# Altium PCB Switch_board_left_PCB.PcbDoc
Units mil, origin at the board's own origin, x right, y up, seen from the top; angles counter-clockwise.
Board outline 2086.61 x 4330.71 mil, 2 copper layers (Top Layer, Bottom Layer); 33 components, 18 nets, 90 pads, 28 vias.
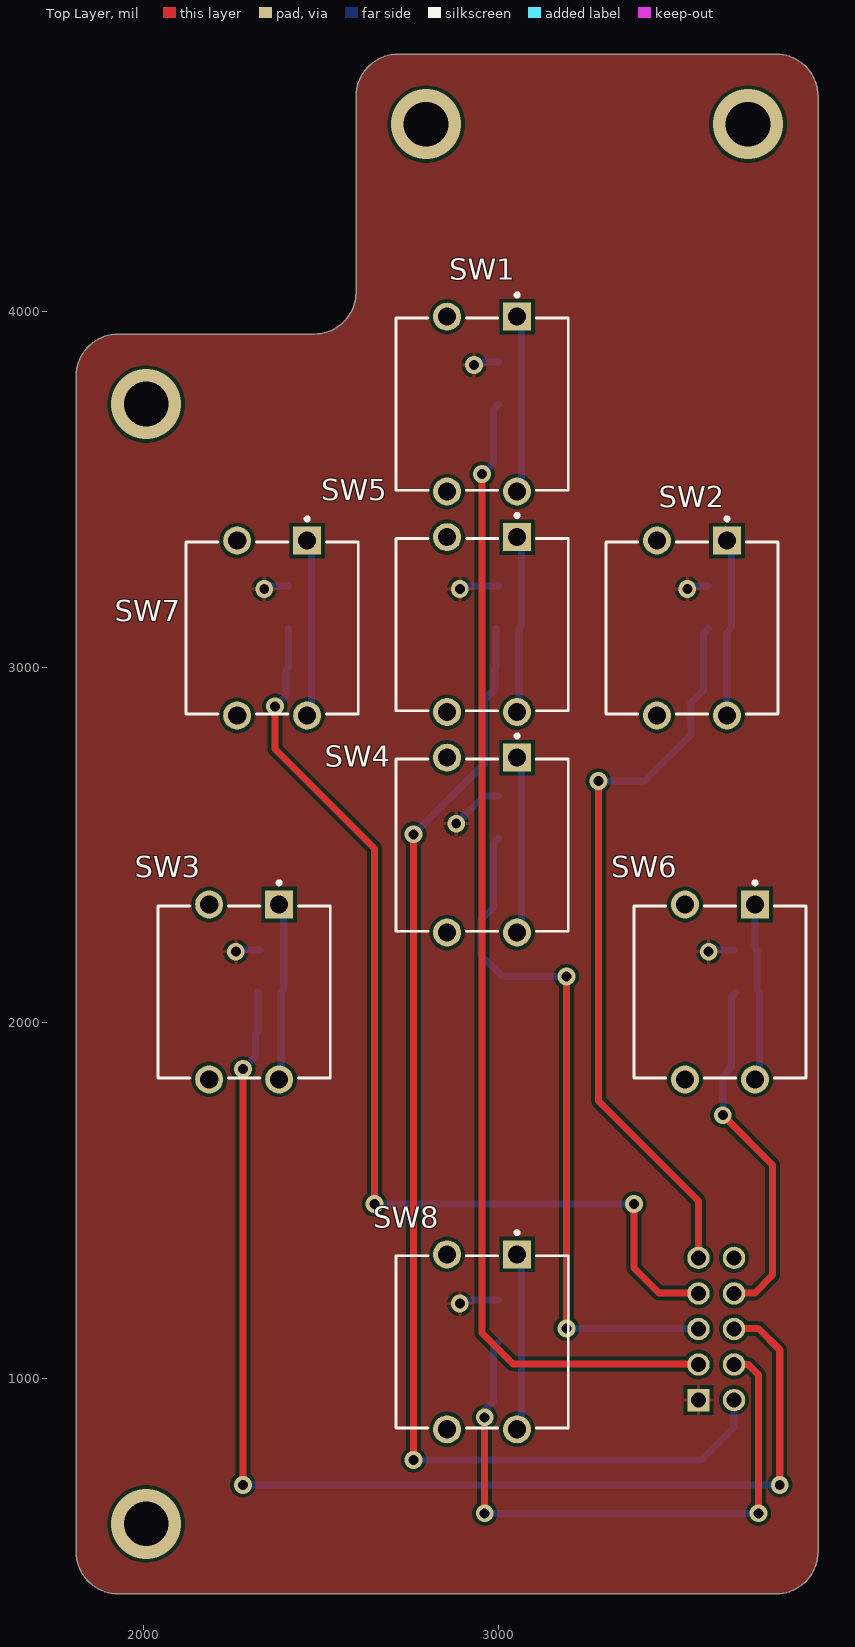
[diagram p0: Top Layer view]
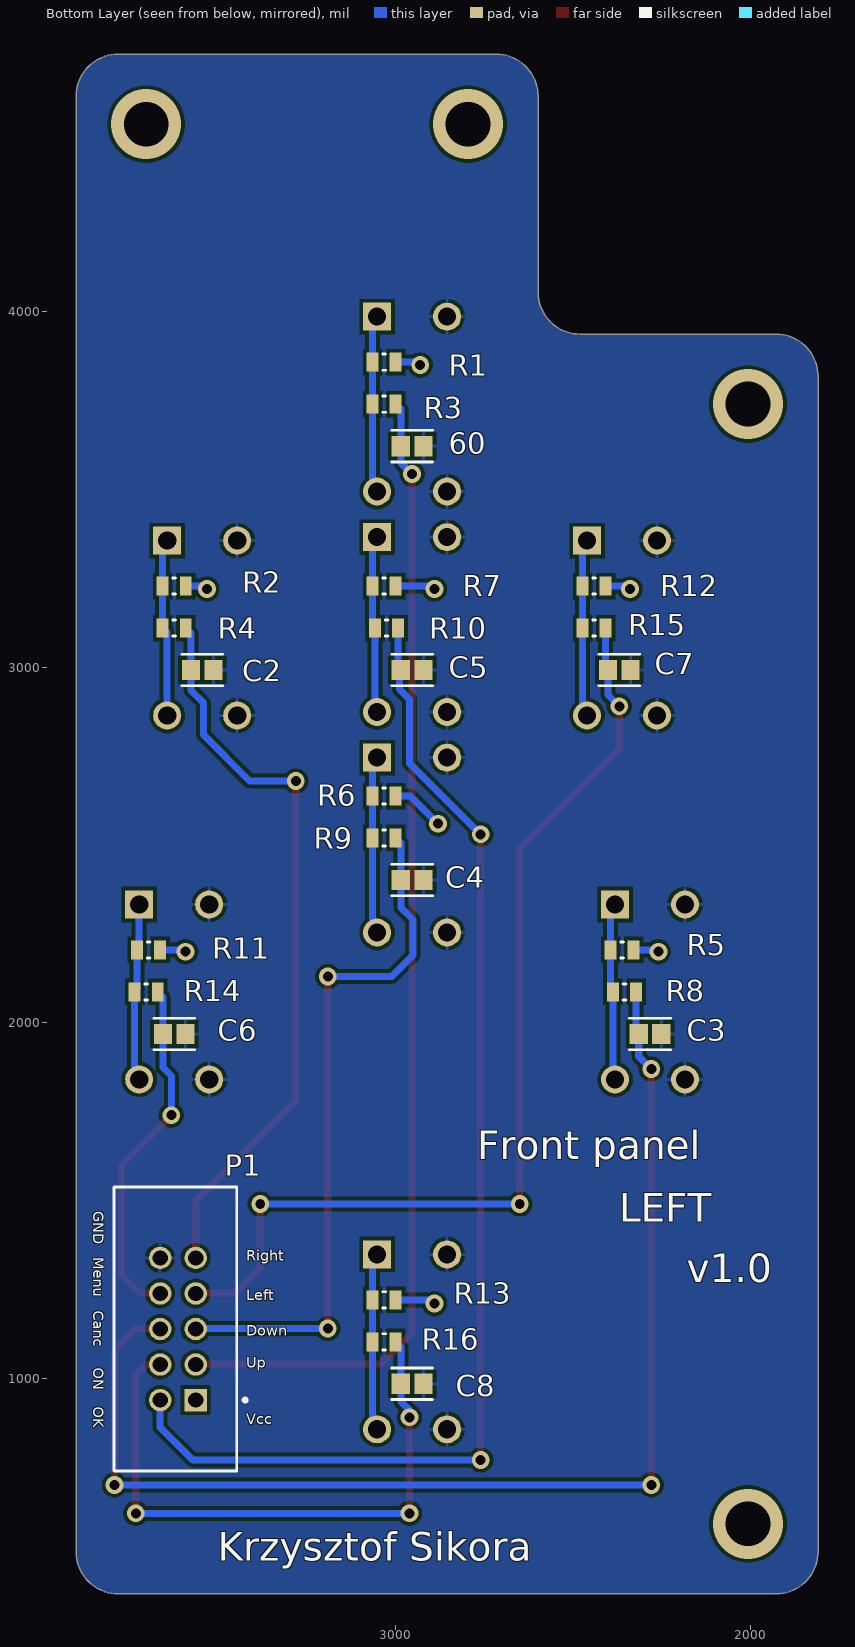
[diagram p1: Bottom Layer view, seen from below]
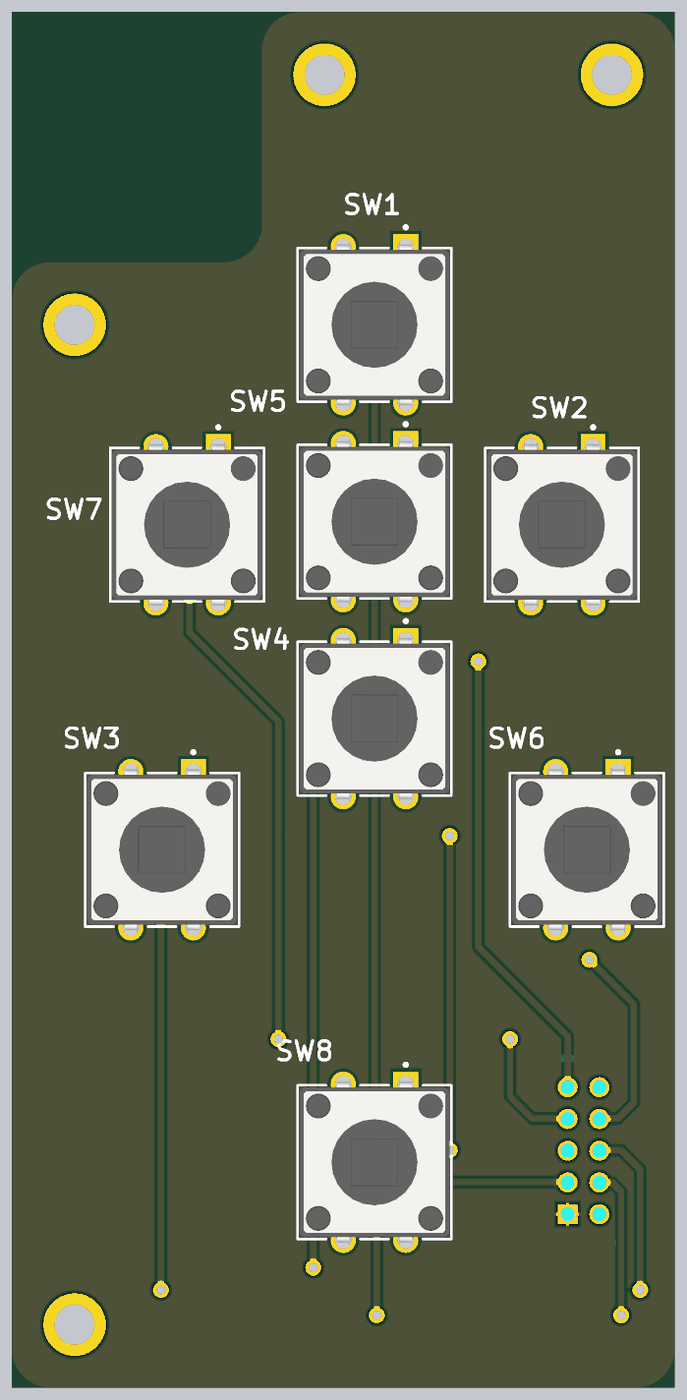
[diagram p2: 3D render of the assembled board from above, using the file's embedded part models]

## Layer stack, top to bottom
Top Solder: solder mask 0.4, Solder Resist, Dk 3.5
Top Layer: signal copper 1.4
Dielectric 1: dielectric 12.6, FR-4, Dk 4.8
Bottom Layer: signal copper 1.4
Bottom Solder: solder mask 0.4, Solder Resist, Dk 3.5

## Board outline
1811.02,511.81 1811.02,3818.9 cw(c1929.13,3818.9) 1929.13,3937.01 2480.32,3937.01 ccw(c2480.32,4055.12) 2598.43,4055.12 2598.43,4606.3 cw(c2716.54,4606.3) 2716.54,4724.41 3779.53,4724.41 cw(c3779.53,4606.3) 3897.64,4606.3 3897.64,511.81 cw(c3779.53,511.81) 3779.53,393.7 1929.13,393.7 cw(c1929.13,511.81)

## Design rules (kind name [scope] priority, off if disabled: settings)
Clearance Clearance_1 [OnMid vs OnMid] p1: gap=10 ignorepadtopadclearanceinfootprint=FALSE sourcerule=36 cellrowname=All cellrowtype=0 cellcolname=All cellcoltype=0 innerlayers=TRUE
Clearance Clearance_2 [(ExistsOnLayer('Top Layer') Or ExistsOnLayer('Bottom Layer')) vs (ExistsOnLayer('Top Layer') Or ExistsOnLayer('Bottom Layer'))] p2: gap=10 ignorepadtopadclearanceinfootprint=FALSE sourcerule=36 cellrowname=All cellrowtype=0 cellcolname=All cellcoltype=0 outerlayers=TRUE
Clearance [All] p3: gap=10 ignorepadtopadclearanceinfootprint=FALSE ismatrix=TRUE
PolygonConnect [All] p1: connectstyle=Relief reliefconductorwidth=10 reliefentries=4 polygonreliefangle="90 Angle" airgapwidth=10
RoutingVias [All] p1: holewidth=28 width=50 viastyle="Through Hole" minholewidth=28 minwidth=50 maxholewidth=28 maxwidth=50
SolderMaskExpansion [All] p1: expansion=4 istentingtop=FALSE
Width [All] p1: maxlimit=40 minlimit=10 preferedwidth=20 minimp=50.000000 maximp=50.000000 favimp=50.000000
30 further rules are at their usual default settings.

## Components (designator, comment, footprint, x,y, rotation, side; value= is the part's Value field where it differs from the comment)
60 "100nF" FP-0805-L_2_01_0_2-W_1_25-IPC_B 2952.76,3622.05 r180 bottom (schematic designator C1)
C2 "100nF" FP-0805-L_2_01_0_2-W_1_25-IPC_B 3543.31,2992.13 r180 bottom
C3 "100nF" FP-0805-L_2_01_0_2-W_1_25-IPC_B 2283.46,1968.5 r180 bottom
C4 "100nF" FP-0805-L_2_01_0_2-W_1_25-IPC_B 2952.76,2401.57 r180 bottom
C5 "100nF" FP-0805-L_2_01_0_2-W_1_25-IPC_B 2952.76,2992.13 r180 bottom
C6 "100nF" FP-0805-L_2_01_0_2-W_1_25-IPC_B 3622.05,1968.5 r180 bottom
C7 "100nF" FP-0805-L_2_01_0_2-W_1_25-IPC_B 2369.85,2992.13 r180 bottom
C8 "100nF" FP-0805-L_2_01_0_2-W_1_25-IPC_B 2952.76,984.25 r180 bottom
P1 "30310-6002HB" 3M-30310-6002HB-10_V 3611.42,1138.58 r90 bottom
R1 "1k" RESC2013X50X30LL20T20 3031.5,3858.27 r180 bottom
R2 "1k" RESC2013X50X30LL20T20 3622.05,3228.35 r180 bottom
R3 "1k" RESC2013X50X30LL20T20 3031.5,3740.16 r0 bottom
R4 "1k" RESC2013X50X30LL20T20 3622.05,3110.24 r0 bottom
R5 "1k" RESC2013X50X30LL20T20 2362.2,2204.72 r180 bottom
R6 "1k" RESC2013X50X30LL20T20 3031.5,2637.8 r180 bottom
R7 "1k" RESC2013X50X30LL20T20 3031.5,3228.35 r180 bottom
R8 "1k" RESC2013X50X30LL20T20 2355.31,2086.61 r0 bottom
R9 "1k" RESC2013X50X30LL20T20 3031.5,2519.68 r0 bottom
R10 "1k" RESC2013X50X30LL20T20 3024.61,3110.24 r0 bottom
R11 "1k" RESC2013X50X30LL20T20 3693.9,2204.72 r180 bottom
R12 "1k" RESC2013X50X30LL20T20 2440.94,3228.35 r180 bottom
R13 "1k" RESC2013X50X30LL20T20 3031.5,1220.47 r180 bottom
R14 "1k" RESC2013X50X30LL20T20 3700.79,2086.61 r0 bottom
R15 "1k" RESC2013X50X30LL20T20 2440.94,3110.24 r0 bottom
R16 "1k" RESC2013X50X30LL20T20 3031.5,1102.36 r0 bottom
SW1 "FSM103" FP-FSM103-MFG 2952.76,3740.16 r90 top
SW2 "FSM103" FP-FSM103-MFG 3543.31,3110.24 r90 top
SW3 "FSM103" FP-FSM103-MFG 2283.46,2086.61 r90 top
SW4 "FSM103" FP-FSM103-MFG 2952.76,2499.66 r90 top
SW5 "FSM103" FP-FSM103-MFG 2952.76,3119.91 r90 top
SW6 "FSM103" FP-FSM103-MFG 3622.05,2086.61 r90 top
SW7 "FSM103" FP-FSM103-MFG 2362.2,3110.24 r90 top
SW8 "FSM103" FP-FSM103-MFG 2952.76,1102.36 r90 top

## Footprints (in the part's own frame and the unit in brackets; to place one, negate y for a bottom-side part, rotate by r counter-clockwise, add the part's x,y. Pads: shape width x height; smd on the part's side, far side on the other; paste and mask are expansions set on the pad)
3M-30310-6002HB-10_V [mm] "CONN, 10-Leads, Body 20.3x8.4mm, Pitch 2.54mm"
  rect 1.6x1.6 hole 1.09: 1(-5.08,-1.27)
  round 1.6 hole 1.09: 2(-5.08,1.27) 3(-2.54,-1.27) 4(-2.54,1.27) 5(0,-1.27) 6(0,1.27) 7(2.54,-1.27) 8(2.54,1.27) 9(5.08,-1.27) 10(5.08,1.27)
  silkscreen extent -10.15,-4.92 10.15,4.58, body extent -10.15,-4.2 10.15,4.61, height 8.89
FP-0805-L_2_01_0_2-W_1_25-IPC_B [mil]
  rect 51.36x57.33 smd paste+0 mask+0: 1(-31.72,0) 2(31.72,0)
  silkscreen extent -57,-44 57,44, body extent -40,-25 40,25, height 55
FP-FSM103-MFG [mm]
  rect 2x2 hole 1.3 paste-2539.97 mask+0: 1(6.25,-2.5)
  round 2 hole 1.3 paste-2539.97 mask+0: 2(-6.25,-2.5) 3(6.25,2.5) 4(-6.25,2.5)
  silkscreen extent -6.15,-6.15 7.92,6.15, body extent -7.35,-6.25 7.35,6.25, height 0.25
RESC2013X50X30LL20T20 [mm] "Chip Resistor, 2-Leads, Body 2.00x1.25mm, IPC High Density"
  rect 0.85x1.35 smd: 1(-0.825,0) 2(0.825,0)
  silkscreen extent -0.1,-0.58 0.1,0.58, body extent -1.1,-0.72 1.1,0.72, height 0.5

## Part data
60 C2 C3 C4 C5 C6 C7 C8: library part CMP-2007-04174-2, "General Purpose Ceramic Capacitor, 0805, 100nF, 10%, X7R, 15%, 100V", Case Code (Imperial)=0805, Case Code (Metric)=2012, Dielectric=X7R, Dielectric Material=Ceramic, Max Operating Temperature=125°C, Min Operating Temperature=-55°C, Package Quantity=2000, Tolerance=10%, Voltage=100V, Capacitance=100nF, Case/Package=0805, Construction=Flat, Contact Plating=Tin, Depth=1.25mm, Height=1.4mm, Lead Free="Lead Free", Length=2.01mm, Mount="Surface Mount", Number of Pins=2, Packaging="Tape and Reel", Radiation Hardening=No, REACH SVHC="No SVHC", RoHS Compliant=Yes, Series=-, Termination=SMD/SMT, Thickness=0.055inch, Voltage Rating=100V, Voltage Rating (DC)=100V, Width=0.049inch
P1: library part CMP-2000-05031-1, "Male Header, Pitch 2.54 mm, 2 x 5 Position, Height 9.3 mm, Tail Length 2.79 mm, -55 to 105 degC, RoHS, Bulk", Current Rating=1A, Manufacturer=3M, Brand=3MElectronicSolutionsDivision, Contact Gender=Pin(Male), Contact Material=Brass, Contact Plating=Gold, Datasheet URL=http://datasheet.octopart.com/30310-6002HB-3M-datasheet-11537585.pdf, Datasheet Version=Apr-12, Factory Pack Quantity=1000, Housing Material=Polyester, Manufacturer URL=http://www.3m.com/, Mating Post Length=5.99mm, Mounting Angle=Straight, Mounting Style=StraightPin, Number of Positions=10Position, Number of Rows=2Row, Packaging=Tray, Pitch=2.54mm, Product=Headers, Product Category=Headers&WireHousings, RoHS=Details, Row Spacing=2.54mm, Series=303, Termination Post Length=2.79mm, Termination Style=ThroughHole, Type=Shrouded
R1 R2 R3 R4 R5 R6 R7 R8 R9 R10 R11 R12 R13 R14 R15 R16: library part CMP-2001-04896-1, Manufacturer="Vishay Dale", Part Number=CRCW08050000Z0EA
SW1 SW2 SW3 SW4 SW5 SW6 SW7 SW8: library part CMP-03407-000037-1, "SWITCH TACTILE SPST-NO 0.05A 24V", Actuator Color=Black, Contact Current Rating=50mA, Contact Resistance=100mR, Max Operating Temperature=85°C, Max Voltage Rating (DC)=12V, Min Operating Temperature=-35°C, Operating Force=1.57N, Package Quantity=400, Voltage Rating=24V, Actuator Length=3.4mm, Actuator Material=Polyester, Contact Material=Brass, Contact Plating=Silver, Current Rating=50mA, Depth=14.1mm, Electrical Life=100000Cycles, Illumination Type=Non-Illuminated, Length=12mm, Max Current Rating=50mA, Mechanical Life=100000Cycles, Mount="Through Hole", Orientation=Straight, Packaging="Loose Piece", Radiation Hardening=No, RoHS Compliant=Yes, Series="FSM100 ~ 104", Switch Function=Off-Mom, Switch Travel=0.3mm, Termination="PC Pins", Throw Configuration=SPST, Type=Switch, Voltage Rating (DC)=12V, Width=12mm

## Via types
v1: diameter 50, hole 28, Top Layer to Bottom Layer, 24 vias
v2: diameter 196.85, hole 125.98, Top Layer to Bottom Layer, 4 vias

## Nets (pads, with @x,y where several pads share a name; then routed paths per layer and width w, separated by ;. In a path a pad name is that pad's centre, name@x,y a point inside that pad or via, vN(x,y) a via of type N, cw(c..) or ccw(c..) an arc to the next point about the centre after c; other vN are vias at no path point)
BtnCancel: C3.1 P1.6 R8.1 | length 3448.4
  Top Layer w20: v1(2280,700) v1(2280,1870) ; P1.6 3662.83,1140 3730,1140 3790,1080 v1(3790,700)
  Bottom Layer w20: v1(2280,700) v1(3790,700) ; v1(2280,1870) 2315.19,1905.19 C3.1 2322.83,1976.15 R8.1
BtnDC_ON: C8.1 P1.4 R16.1 | length 1738.9
  Top Layer w20: v1(2960,620) v1(2960,890) ; P1.4 3701.42,1038.58 3730,1010 3730,627.78 v1(3730,620)
  Bottom Layer w20: v1(2960,620) v1(3730,620) ; v1(2960,890) 2960,910 2984.48,934.48 C8.1 2984.48,1087.83 R16.1
BtnDOWN: C4.1 P1.5 R9.1 | length 1976.8
  Top Layer w20: v1(3190,1140) v1(3190,2130)
  Bottom Layer w20: R9.1 2984.48,2505.15 C4.1 2984.48,2324.48 2950,2290 2950,2190 3010,2130 v1(3190,2130) ; v1(3190,1140) 3560,1140 P1.5
BtnLEFT: C7.1 P1.7 R15.1 | length 2873.1
  Top Layer w20: v1(2370,2890) 2370,2770 2650,2490 v1(2650,1490) ; v1(3380,1490) 3380,1310 3450,1240 3560,1240 P1.7
  Bottom Layer w20: v1(2370,2890) 2401.57,2921.57 C7.1 2408.46,2999.02 R15.1 ; v1(2650,1490) v1(3380,1490)
BtnMenu: C6.1 P1.8 R14.1 | length 1000.4
  Top Layer w20: v1(3630,1740) 3770,1600 3770,1290 3720,1240 3662.83,1240 P1.8
  Bottom Layer w20: v1(3630,1740) 3630,1850 3653.77,1873.77 C6.1 3653.77,2072.08 R14.1
BtnOK: C5.1 P1.2 R10.1 | length 3458.2
  Top Layer w20: v1(2760,770) v1(2760,2530)
  Bottom Layer w10: C5.1 C5.1@2988.3,2995.95
  Bottom Layer w20: v1(2760,770) 3570,770 3661.42,861.42 P1.2 ; v1(2760,2530) 2960,2730 2960,2910 2988.3,2938.3 2988.3,2995.95 2992.13,2999.77 R10.1
BtnRIGHT: C2.1 P1.9 R4.1 | length 2092.6
  Top Layer w20: v1(3280,2680) 3280,1780 3561.42,1498.58 P1.9
  Bottom Layer w20: v1(3280,2680) 3410,2680 3540,2810 3540,2900 3575.03,2935.03 C2.1 3575.03,3095.7 R4.1
BtnUP: 60.1 P1.3 R3.1 | length 3277.5
  Top Layer w20: v1(2952.76,3543.31) 2952.76,1127.24 3040,1040 3560,1040 P1.3
  Bottom Layer w20: v1(2952.76,3543.31) 2984.48,3575.03 60.1 2984.48,3725.62 R3.1
GND: 60.2 C2.2 C3.2 C4.2 C5.2 C6.2 C7.2 C8.2 P1.10 SW1.3 SW1.4 SW2.3 SW2.4 SW3.3 SW3.4 SW4.3 SW4.4 SW5.3 SW5.4 SW6.3 SW6.4 SW7.3 SW7.4 SW8.3 SW8.4
NetR1_1: R1.1 R3.2 SW1.1 SW1.2 | length 502.7
  Bottom Layer w20: SW1.2 3063.98,3506.89 R3.2 R1.1 3063.98,3973.43 SW1.1
NetR2_1: R2.1 R4.2 SW2.1 SW2.2 | length 502.7
  Bottom Layer w20: SW2.2 3641.73,3097.44 R4.2 R2.1 3654.53,3343.5 SW2.1
NetR5_1: R5.1 R8.2 SW3.1 SW3.2 | length 502.7
  Bottom Layer w20: SW3.2 2387.8,1846.46 R8.2 2394.68,2093.5 R5.1 2394.68,2319.88 SW3.1
NetR6_1: R6.1 R9.2 SW4.1 SW4.2 | length 502.7
  Bottom Layer w20: SW4.2 3063.98,2266.4 R9.2 R6.1 3063.98,2732.93 SW4.1
NetR7_1: R7.1 R10.2 SW5.1 SW5.2 | length 502.7
  Bottom Layer w20: SW5.2 3057.09,2879.75 R10.2 3063.98,3117.13 R7.1 3063.98,3353.18 SW5.1
NetR11_1: R11.1 R14.2 SW6.1 SW6.2 | length 502.7
  Bottom Layer w20: SW6.2 3733.27,1853.35 R14.2 3726.38,2093.5 R11.1 3720.47,2210.63 SW6.1
NetR12_1: R12.1 R15.2 SW7.1 SW7.2 | length 502.7
  Bottom Layer w20: SW7.2 2473.43,2876.97 R15.2 R12.1 2473.43,3343.5 SW7.1
NetR13_1: R13.1 R16.2 SW8.1 SW8.2 | length 502.7
  Bottom Layer w20: SW8.2 3063.98,869.09 R16.2 R13.1 3063.98,1335.63 SW8.1
Vcc3_3: P1.1 R1.2 R2.2 R5.2 R6.2 R7.2 R11.2 R12.2 R13.2 | length 729.5
  Bottom Layer w20: v1(2260,2200) 2264.72,2204.72 R5.2 ; v1(2340,3220) 2348.35,3228.35 R12.2 ; v1(2880,2560) 2957.8,2637.8 R6.2 ; v1(2890,1210) 2900.47,1220.47 R13.2 ; v1(2890,3220) 2898.35,3228.35 R7.2 ; v1(2930,3850) 2938.27,3858.27 R1.2 ; v1(3530,3220) 3538.35,3228.35 R2.2 ; v1(3590,2200) 3594.72,2204.72 R11.2
copper on no net:
  other v2: 2007.87,590.55 2007.87,3740.16 2795.28,4527.56 3700.79,4527.56

## Polygon pours and split planes (outlines as drawn)
GND on Bottom Layer "GND_L02_P002" (solid, remove dead copper, pour order 2): 1811.02,511.81 1811.02,3818.9 cw(c1929.13,3818.9) 1929.13,3937.01 2476.98,3937.01 ccw(c2476.98,4058.45) 2598.43,4058.45 2598.43,4606.3 cw(c2716.54,4606.3) 2716.54,4724.41 3779.53,4724.41 cw(c3779.53,4606.3) 3897.64,4606.3 3897.64,511.81 cw(c3779.53,511.81) 3779.53,393.7 1929.13,393.7 cw(c1929.13,511.81)
Vcc3_3 on Top Layer "VCC3_3_L01_P001" (solid, remove dead copper, pour order 1): 1811.02,511.81 1811.02,3818.9 cw(c1929.13,3818.9) 1929.13,3937.01 2476.98,3937.01 ccw(c2476.98,4058.45) 2598.43,4058.45 2598.43,4606.3 cw(c2716.54,4606.3) 2716.54,4724.41 3779.53,4724.41 cw(c3779.53,4606.3) 3897.64,4606.3 3897.64,511.81 cw(c3779.53,511.81) 3779.53,393.7 1929.13,393.7 cw(c1929.13,511.81)

## Silkscreen, mask and mechanical layers (free items; w line width, h text height)
Bottom Overlay:
  text "Front panel" at 2770,1616.66 h80
  text "GND" at 3850,1470 h30 r90
  text "LEFT" at 2370,1440 h80
  text "Menu" at 3850,1340 h30 r90
  text "Right" at 3420,1330 h30
  text "v1.0" at 2180,1270 h80
  text "Left" at 3420,1220 h30
  text "Canc" at 3850,1190 h30 r90
  text "Down" at 3420,1120 h30
  text "Up" at 3420,1030 h30
  text "ON" at 3850,1030 h30 r90
  text "OK" at 3850,920 h30 r90
  text "Vcc" at 3420,870 h30
  text "Krzysztof Sikora" at 3500,486.66 h80
Mechanical 1:
  lines w10: 1811.02,511.81 ccw(c1929.13,511.81) 1929.13,393.7 3779.53,393.7 ccw(c3779.53,511.81) 3897.64,511.81 3897.64,4606.3 ccw(c3779.53,4606.3) 3779.53,4724.41 2716.54,4724.41 ccw(c2716.54,4606.3) 2598.43,4606.3 2598.43,4058.45 cw(c2476.98,4058.45) 2476.98,3937.01 1929.13,3937.01 ccw(c1929.13,3818.9) 1811.02,3818.9 1811.02,511.81